# EAGLE board NyanTimer-v5 (EAGLE 9.4.2)
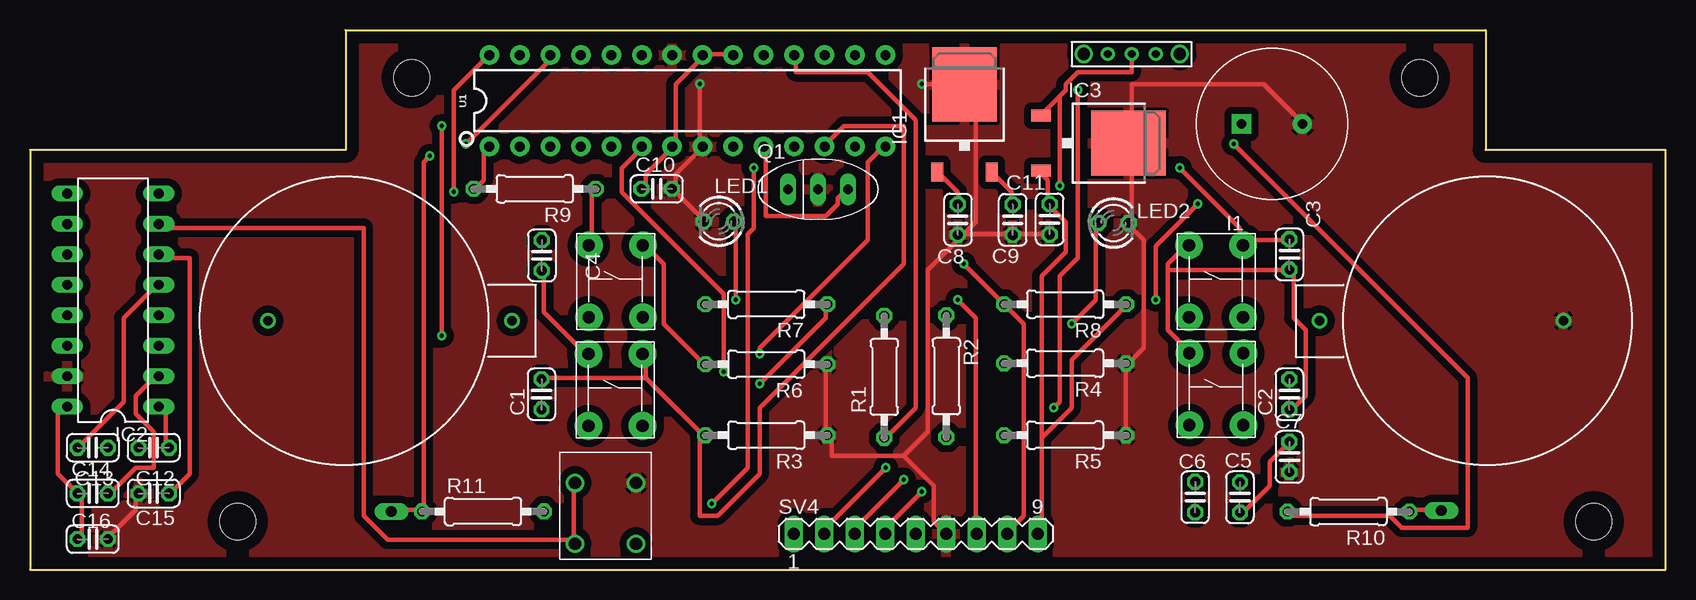
[diagram p0: board, top side]
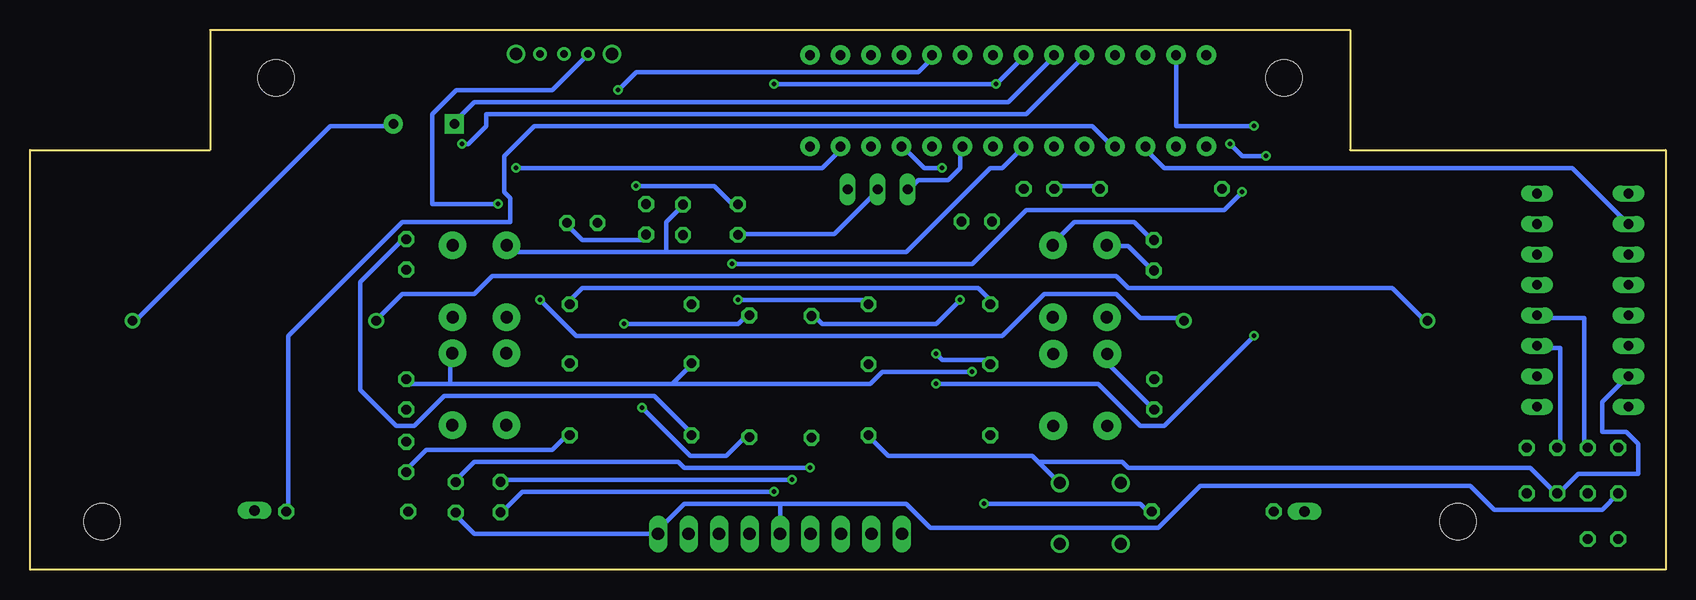
[diagram p1: board, bottom side, seen from below]

Size 136.31 x 45 mm. Coordinates in mm from the lower left corner, seen from the top.
Outline: 26.31,35 0,35 0,0 136.31,0 136.31,35 121.31,35 121.31,45 26.31,45 26.31,35
Copper layers (1*16): Top 0.035mm / dielectric 1.5mm / Bottom 0.035mm
Design rules "default": minimum track width 6mil, minimum drill 0.35mm, track to track 6mil, track to pad 6mil, pad to pad 6mil, via to via 6mil, smd to smd 6mil, copper to edge 40mil, drill to drill 6mil, minimum pad ring 10mil, minimum via ring 8mil, stop-mask expansion 4mil, vias tented up to drill 0mil, thermal gap 10mil
Net classes: 0 default: width 0.381 mm, clearance 0.381 mm
Holes 3 mm at 31.81,41 17.31,4 115.81,41 130.31,4

## Footprints (pad centres in the part's own frame; a part is rotated, then mirrored left to right if it is on the bottom)
AKIZUKI_CR2032 = drill 0.8: MINUS 0,20.32; PLUS 0,0
C025-024X044 = drill 0.813 octagon: 1 -1.27,0; 2 1.27,0
TACT_SWITCH = drill 1.016 pad 2.3: 1 0,0; 2 4.5,0; 3 0,6; 4 4.5,6
PKM13EPYH4000 = drill 0.8 pad 1.6 square: 1 0,0 | drill 0.8 pad 1.6: 2 5.08,0
TO252 = smd 1 x 1.6: 1 -2.28,-4.8; 2 2.28,-4.8 | smd 5.4 x 6.2: 3 0,2.5
DIL16 = drill 0.813 long: 1 -8.89,-3.81; 2 -6.35,-3.81; 3 -3.81,-3.81; 4 -1.27,-3.81; 5 1.27,-3.81; 6 3.81,-3.81; 7 6.35,-3.81; 8 8.89,-3.81; 9 8.89,3.81; 10 6.35,3.81; 11 3.81,3.81; 12 1.27,3.81; 13 -1.27,3.81; 14 -3.81,3.81; 15 -6.35,3.81; 16 -8.89,3.81
LED3MM = drill 0.813 octagon: A -1.27,0; K 1.27,0
PHONE = drill 1.016: GND 0,-5.08; PIN1 5.08,-5.08; PIN2 0,0; PIN3 5.08,0
1PINHEAD = drill 0.9 long: P$1 0,0
CSTLA_T = drill 0.813 long: 1 -2.5,0; 2 0,0; 3 2.5,0
0207/10 = drill 0.813 octagon: 1 -5.08,0; 2 5.08,0
MA09-1 = drill 1.016 long: 1 -10.16,0; 2 -7.62,0; 3 -5.08,0; 4 -2.54,0; 5 0,0; 6 2.54,0; 7 5.08,0; 8 7.62,0; 9 10.16,0
AKIZUKI_SWITCH = drill 0.65: PIN1 2,0; PIN2 4,0; PIN3 6,0 | drill 1.016: SIDE1 0,0; SIDE2 8,0
DIP28 = drill 0.813 pad 1.626: 1 -16.51,-3.81; 2 -13.97,-3.81; 3 -11.43,-3.81; 4 -8.89,-3.81; 5 -6.35,-3.81; 6 -3.81,-3.81; 7 -1.27,-3.81; 8 1.27,-3.81; 9 3.81,-3.81; 10 6.35,-3.81; 11 8.89,-3.81; 12 11.43,-3.81; 13 13.97,-3.81; 14 16.51,-3.81; 15 16.51,3.81; 16 13.97,3.81; 17 11.43,3.81; 18 8.89,3.81; 19 6.35,3.81; 20 3.81,3.81; 21 1.27,3.81; 22 -1.27,3.81; 23 -3.81,3.81; 24 -6.35,3.81; 25 -8.89,3.81; 26 -11.43,3.81; 27 -13.97,3.81; 28 -16.51,3.81

## Placement (x,y rotation side)
BT1  AKIZUKI_CR2032  [AKIZUKI_CR2032]  40.16,20.75 90 top
BT2  AKIZUKI_CR2032  [AKIZUKI_CR2032]  107.46,20.75 270 top
C1  0.1u  [C025-024X044]  42.63,14.61 90 top
C2  0.1u  [C025-024X044]  104.95,14.61 90 top
C3  0.1u  [C025-024X044]  104.95,26.28 90 top
C4  0.1u  [C025-024X044]  42.65,26.2 90 top
C5  1u  [C025-024X044]  100.83,6.02 90 top
C6  1u  [C025-024X044]  97.1,6.04 90 top
C7  0.1u  [C025-024X044]  104.95,9.39 90 top
C8  200u  [C025-024X044]  77.32,29.19 270 top
C9  0.1u  [C025-024X044]  81.89,29.17 270 top
C10  0.1u  [C025-024X044]  52.22,31.75 0 top
C11  0.1u  [C025-024X044]  84.97,29.21 270 top
C12  0.1u  [C025-024X044]  10.31,10.16 180 top
C13  0.1u  [C025-024X044]  5.23,10.16 180 top
C14  0.1u  [C025-024X044]  5.23,6.35 0 top
C15  0.1u  [C025-024X044]  10.31,6.35 180 top
C16  0.1u  [C025-024X044]  5.23,2.54 0 top
CONNECTOR1  TACT_SWITCH  [TACT_SWITCH]  46.54,11.98 0 top
CONNECTOR2  TACT_SWITCH  [TACT_SWITCH]  96.61,12.04 0 top
CONNECTOR3  TACT_SWITCH  [TACT_SWITCH]  96.59,21.04 0 top
CONNECTOR4  TACT_SWITCH  [TACT_SWITCH]  46.57,21.04 0 top
I1  P-04118_PKM13EPYH4000  [PKM13EPYH4000]  100.95,37.16 0 top
IC1  7815DT  [TO252]  77.88,37.95 0 top
IC2  MAX232  [DIL16]  6.92,22.47 90 top
IC3  7815DT  [TO252]  89.05,35.56 270 top
LED1  [LED3MM]  57.41,29.03 180 top
LED2  [LED3MM]  90.29,28.91 0 top
PHN1  PHONE  [PHONE]  50.5,2.14 180 top
PIN1  1PINHEAD  [1PINHEAD]  30.11,4.84 0 top
PIN2  1PINHEAD  [1PINHEAD]  117.61,4.92 0 top
Q1  [CSTLA_T]  65.67,31.71 0 top
R1  220  [0207/10]  71.19,16.07 90 top
R2  220  [0207/10]  76.36,16.12 90 top
R3  10k  [0207/10]  61.36,11.2 180 top
R4  10k  [0207/10]  86.26,17.2 180 top
R5  10k  [0207/10]  86.26,11.2 180 top
R6  10k  [0207/10]  61.36,17.12 180 top
R7  10k  [0207/10]  61.36,22.12 0 top
R8  10k  [0207/10]  86.26,22.12 180 top
R9  10k  [0207/10]  42.06,31.75 180 top
R10  10M  [0207/10]  109.87,4.83 180 top
R11  10M  [0207/10]  37.75,4.84 0 top
SV4  [MA09-1]  73.81,2.97 0 top
SW1  AKIZUKI_SWITCH  [AKIZUKI_SWITCH]  87.81,43 0 top
U1  328P  [DIP28]  54.79,39.09 0 top

## Library data of the parts
BT1 BT2 = akizuki_cr2032
C1-C16 = rcl; SPICEPREFIX: C
CONNECTOR1-CONNECTOR4 = akizuki_tact_switch
I1 = Akizuki
IC1 IC3 = linear
IC2 = maxim; MF: MAXIM; MPN: MAX232ACPE+; OC_FARNELL: 9723773; OC_NEWARK: 68K4544
LED1 LED2 = led
PHN1 = akizuki_phone_jack
PIN1 PIN2 = 1pinhead
Q1 = murata-resonators
R1-R11 = resistor
SV4 = con-lstb; OC_FARNELL: unknown; OC_NEWARK: unknown
SW1 = akizuki_switch
U1 = SparkFun-IC-Microcontroller; PROD_ID: IC-09136

## Nets
+5V: C1.1 C2.1 C3.1 C4.1 C9.1 C10.1 CONNECTOR1.3 CONNECTOR2.3 CONNECTOR3.3 CONNECTOR4.3 IC1.2 R9.1 U1.7 U1.20 U1.21
BUZ+: I1.1 U1.23
GND: BT2.MINUS C7.1 C8.2 C9.2 C10.2 C11.2 C15.2 C16.2 I1.2 IC1.3 IC2.15 IC3.3 LED1.K LED2.K PHN1.GND Q1.2 R3.1 R4.1 R5.1 R6.1 SV4.6 U1.8 U1.22
LEDG: R2.1 U1.19
LEDR: R1.1 U1.18
N$1: LED1.A R1.2
N$2: LED2.A R2.2
N$3: C5.2 SV4.2
N$4: C6.1 SV4.4
N$5: C6.2 SV4.3
N$7: BT1.MINUS BT2.PLUS
N$8: R9.2 U1.1
N$9: C12.2 IC2.3
N$10: C12.1 IC2.1
N$11: C13.1 IC2.4
N$12: C13.2 IC2.5
N$13: C14.2 IC2.2
N$14: C15.1 IC2.6
PADL: PIN1.P$1 R11.1 U1.26
PADLIN: R11.2 U1.11
PADR: PIN2.P$1 R10.1 U1.4
PADRIN: R10.2 U1.24
PHONE: IC2.7 PHN1.PIN1 PHN1.PIN3
S1: Q1.1 U1.9
S3: Q1.3 U1.10
SCL: R8.2 SV4.8 U1.28
SDA: R7.2 SV4.7 U1.27
SW1: C1.2 CONNECTOR1.4 R3.2 U1.12
SW2: C2.2 CONNECTOR2.4 R4.2 U1.6
SW3: C3.2 CONNECTOR3.4 R5.2 U1.13
SW4: C4.2 CONNECTOR4.4 R6.2 U1.14
T2IN: IC2.10 U1.3
VCC: C5.1 C7.2 C11.1 C14.1 C16.1 IC2.16 IC3.2 R7.1 R8.1 SV4.5 SV4.9
VSW: BT1.PLUS SW1.PIN1
VSWOUT: C8.1 IC1.1 IC3.1 SW1.PIN2

## Tracks (layer width: path | path; a pad name or v marks a point on that pad's centre or on a via)
+5V
  Top 0.381: C2.1 105.31,13.5 106.31,14.5 106.31,20 105.31,21 105.31,25 C3.1 104.81,25 94.81,25 | IC1.2 81.81,31.5 81.81,30.5 C9.1 | 94.81,25 94.81,25.5 96.31,27 CONNECTOR3.3 | 94.81,25 94.81,20 96.31,18.5 CONNECTOR2.3 | U1.20 58.31,43 56.31,43 U1.21 55.81,42.5 53.81,40.5 53.81,35.5 U1.7 53.31,35 51.31,33 51.31,32 C10.1 | CONNECTOR4.3 46.81,27.5 46.81,31.5 R9.1 | CONNECTOR1.3 46.31,18 42.81,21.5 42.81,24.5 C4.1
  Bottom 0.381: 83.31,26.5 83.31,29 82.31,30 C9.1 | 83.31,26.5 95.81,26.5 96.31,27 CONNECTOR3.3 | C1.1 42.81,13.5 46.81,17.5 CONNECTOR1.3 | C4.1 42.81,25 44.81,27 46.31,27 CONNECTOR4.3 | R9.1 47.31,32 50.81,32 C10.1 | 83.31,26.5 63.31,26.5 56.31,33.5 55.31,33.5 53.81,35 U1.7
BUZ+
  Bottom 0.381: I1.1 100.81,37.5 99.31,39 54.81,39 51.31,42.5 U1.23
GND  (via drill 0.35)
  Top 0.381: C16.2 6.81,3 8.81,5 8.81,6 C15.2 | R6.1 66.31,17 66.31,11.5 R3.1 66.81,11 66.81,9.5 72.81,9.5 | 72.81,9.5 75.31,7 75.31,4 76.31,3 SV4.6 | R5.1 91.31,11.5 91.31,17 R4.1 91.81,17.5 92.81,18.5 92.81,27.5 91.81,28.5 LED2.K 91.81,29 91.81,35.5 IC3.3 91.81,36 91.81,40.5 102.81,40.5 105.81,37.5 I1.2 | C11.2 84.81,28 82.31,28 C9.2 81.81,28 77.81,28 | LED1.K 55.81,29.5 53.81,31.5 C10.2 53.81,32 53.81,33 55.81,35 U1.8 55.81,35.5 v55.81,40.5 | 77.81,28 78.81,29 78.81,39.5 78.31,40 IC1.3 77.81,40.5 v74.31,40.5 | 77.81,28 C8.2 77.31,27.5 74.81,25 74.81,11.5 72.81,9.5
  Bottom 0.381: IC2.15 3.31,16 5.31,14 5.31,11.5 3.31,11.5 2.31,10.5 2.31,8 7.31,8 8.81,6.5 C15.2 9.31,6.5 11.31,8.5 44.81,8.5 45.31,9 52.31,9 | 52.31,9 52.81,9.5 64.81,9.5 66.31,11 R3.1 | 52.31,9 50.81,7.5 PHN1.GND | BT2.MINUS 127.31,21 111.31,37 106.31,37 I1.2 | C7.1 104.81,8.5 103.31,10 92.81,10 91.81,11 R5.1 | LED2.K 91.31,28.5 90.31,27.5 85.31,27.5 C11.2 | U1.22 53.81,42.5 v55.81,40.5 v74.31,40.5 | Q1.2 65.81,31.5 69.31,28 77.31,28 C8.2
  pour Top (isolate 0.61): -1.19,37.5 23.81,37.5 23.81,45 26.31,47.5 123.81,47.5 123.81,37.5 138.81,37.5 138.81,0 136.31,-2.5 -1.19,-2.5
LEDG  (via drill 0.35)
  Top 0.381: v85.31,13.5 85.81,14 85.81,24.5 87.31,26 v87.31,40
  Bottom 0.381: v85.31,13.5 81.31,9.5 78.31,9.5 76.81,11 R2.1 | v87.31,40 85.81,41.5 62.31,41.5 61.31,42.5 U1.19
LEDR
  Top 0.381: R1.1 71.31,11 73.81,13.5 73.81,37.5 69.81,41.5 63.81,41.5 63.81,42.5 U1.18
N$1  (via drill 0.35)
  Top 0.381: v58.81,22.5 58.81,29 LED1.A
  Bottom 0.381: v58.81,22.5 60.81,20.5 70.31,20.5 70.81,21 R1.2
N$2  (via drill 0.35)
  Top 0.381: v86.81,20.5 88.81,22.5 88.81,28.5 LED2.A
  Bottom 0.381: v86.81,20.5 77.31,20.5 76.81,21 R2.2
N$3  (via drill 0.35)
  Top 0.381: v71.31,8.5 66.31,3.5 66.31,3 SV4.2
  Bottom 0.381: v71.31,8.5 81.81,8.5 82.31,9 99.31,9 100.81,7.5 C5.2
N$4  (via drill 0.35)
  Top 0.381: v74.31,6.5 71.31,3.5 71.31,3 SV4.4
  Bottom 0.381: v74.31,6.5 95.31,6.5 96.81,5 C6.1
N$5  (via drill 0.35)
  Top 0.381: v72.81,7.5 68.81,3.5 68.81,3 SV4.3
  Bottom 0.381: v72.81,7.5 96.81,7.5 C6.2
N$7
  Bottom 0.381: BT1.MINUS 20.31,21 22.81,23.5 44.81,23.5 45.81,24.5 97.81,24.5 99.31,23 105.31,23 107.31,21 BT2.PLUS
N$8
  Top 0.381: R9.2 37.31,32 37.81,32.5 37.81,35 U1.1
N$9
  Bottom 0.381: C12.2 8.81,10.5 8.81,18.5 10.31,18.5 IC2.3
N$10
  Top 0.381: IC2.1 11.31,13 11.31,10.5 C12.1
N$11
  Bottom 0.381: C13.1 6.81,10.5 6.81,21 10.31,21 IC2.4
N$12
  Top 0.381: C13.2 4.31,10.5 7.81,14 7.81,21 10.31,23.5 IC2.5
N$13
  Top 0.381: C14.2 6.81,6.5 8.81,8.5 10.31,8.5 10.31,11.5 8.81,13 8.81,14.5 10.31,16 IC2.2
N$14
  Top 0.381: IC2.6 10.81,26 13.31,26 13.31,8 11.81,6.5 C15.1
PADL  (via drill 0.35)
  Top 0.381: PIN1.P$1 30.31,5 32.31,5 R11.1 32.81,5 32.81,34 v33.31,34.5 | v36.31,35.5 43.31,42.5 U1.26
  Bottom 0.381: v36.31,35.5 35.31,34.5 v33.31,34.5
PADLIN  (via drill 0.35)
  Top 0.381: v56.81,5.5 59.81,8.5 59.81,28 60.31,28.5 v60.31,33.5
  Bottom 0.381: v56.81,5.5 43.81,5.5 43.31,5 R11.2 | v60.31,33.5 61.81,33.5 63.31,35 U1.11
PADR
  Top 0.381: R10.1 115.31,5 117.31,5 PIN2.P$1
  Bottom 0.381: U1.4 46.31,35.5 47.81,37 94.31,37 96.81,34.5 96.81,31.5 96.31,31 96.31,29 105.31,29 114.81,19.5 114.81,5 R10.1
PADRIN  (via drill 0.35)
  Top 0.381: v100.31,35.5 119.81,16 119.81,3.5 114.31,3.5 113.31,4.5 104.81,4.5 R10.2
  Bottom 0.381: v100.31,35.5 99.81,35.5 98.31,37 98.31,38 53.31,38 48.81,42.5 U1.24
PHONE
  Top 0.381: 45.31,2.5 29.81,2.5 27.81,4.5 27.81,28.5 10.81,28.5 IC2.7 | 45.31,2.5 45.31,7 PHN1.PIN1 | 45.31,2.5 PHN1.PIN3
S1
  Bottom 0.381: Q1.1 62.81,32 62.31,32.5 59.81,32.5 58.81,33.5 58.81,35 U1.9
S3
  Top 0.381: Q1.3 67.81,31.5 67.31,31 67.31,30.5 66.31,29.5 61.31,29.5 61.31,35 U1.10
SCL  (via drill 0.35)
  Top 0.381: SV4.8 81.81,3 81.81,3.5 82.81,4.5 82.81,20.5 81.31,22 R8.2 80.81,22.5 v77.81,25.5 | v35.31,31.5 35.31,40 37.81,42.5 U1.28
  Bottom 0.381: v35.31,31.5 36.81,30 53.31,30 57.81,25.5 v77.81,25.5
SDA  (via drill 0.35)
  Top 0.381: v77.31,22.5 78.81,21 78.81,3 SV4.7 | v34.31,19.5 v34.31,37 | v60.81,15.5 66.31,21 66.31,22 R7.2
  Bottom 0.381: v77.31,22.5 66.81,22.5 R7.2 | v34.31,37 40.81,37 40.81,42.5 U1.27 | v34.31,19.5 41.81,12 43.81,12 47.31,15.5 v60.81,15.5
SW1
  Top 0.381: 51.31,16 55.81,11.5 R3.2 55.81,11 55.81,4.5 57.31,4.5 60.81,8 60.81,13.5 72.81,25.5 72.81,37 67.81,37 66.31,35.5 U1.12 | 51.31,16 51.31,17.5 CONNECTOR1.4 | 51.31,16 42.81,16 C1.2
SW2  (via drill 0.35)
  Top 0.381: v57.81,16.5 57.81,23 49.31,31.5 49.31,33.5 50.81,35 U1.6
  Bottom 0.381: 82.81,15.5 81.31,17 R4.2 | 101.31,15.5 104.81,15.5 C2.2 | 101.31,15.5 82.81,15.5 | v57.81,16.5 65.31,16.5 66.31,15.5 82.81,15.5 | 101.31,15.5 101.31,18 CONNECTOR2.4
SW3  (via drill 0.35)
  Top 0.381: v95.81,33.5 100.81,28.5 100.81,27.5 CONNECTOR3.4 101.31,27.5 104.81,27.5 C3.2
  Bottom 0.381: R5.2 81.31,11.5 84.31,14.5 101.81,14.5 104.31,12 105.81,12 108.81,15 108.81,24 105.31,27.5 C3.2 | v95.81,33.5 70.31,33.5 68.81,35 U1.13
SW4  (via drill 0.35)
  Top 0.381: R6.2 55.81,17.5 52.81,20.5 52.81,25.5 51.31,27 CONNECTOR4.4 | v60.81,18 60.81,18.5 69.81,27.5 69.81,34 70.81,35 U1.14
  Bottom 0.381: C4.2 42.81,27.5 44.31,29 49.31,29 50.81,27.5 CONNECTOR4.4 | v60.81,18 60.31,17.5 56.31,17.5 R6.2
T2IN
  Bottom 0.381: IC2.10 3.31,29 7.81,33.5 41.81,33.5 43.31,35 U1.3
VCC
  Top 0.381: C16.1 4.31,3 4.31,6 C14.1 2.31,8 2.31,13 2.81,13.5 IC2.16 | C5.1 101.31,5 103.31,7 103.31,9 104.81,10.5 C7.2 | IC3.2 84.31,33 84.81,32.5 84.81,30.5 C11.1 85.31,30 86.31,29 86.31,26.5 84.31,24.5 84.31,11 | 84.31,11 84.31,3 SV4.9 | 84.31,11 86.81,13.5 86.81,17.5 91.31,22 R8.1
  Bottom 0.381: R7.1 56.31,22.5 57.31,23.5 90.31,23.5 91.31,22.5 R8.1 | 73.81,5.5 SV4.5 | 73.81,5.5 81.81,5.5 84.31,3 | 84.31,3 99.31,3 100.81,4.5 C5.1 | 84.31,3 SV4.9 | C14.1 5.31,5 14.31,5 16.31,7 38.81,7 42.31,3.5 61.31,3.5 63.31,5.5 73.81,5.5
VSW  (via drill 0.35)
  Top 0.381: v97.31,30.5 93.81,27 v93.81,22.5
  Bottom 0.381: SW1.PIN1 92.81,40 100.81,40 102.81,38 102.81,30.5 v97.31,30.5 | v93.81,22.5 90.81,19.5 55.31,19.5 51.81,23 45.81,23 43.81,21 40.31,21 BT1.PLUS
VSWOUT  (via drill 0.35)
  Top 0.381: IC1.1 75.81,33 77.31,31.5 77.46,30.91 C8.1 | 85.81,39.5 86.31,40 86.31,40.5 87.31,41.5 91.81,41.5 SW1.PIN2 | 85.81,39.5 84.31,38 IC3.1 | 85.81,39.5 v85.81,32
  Bottom 0.381: v85.81,32 79.31,32 77.81,30.5 C8.1